# EAGLE board 200429 eAR ECU MPS20 PX Sensor PTH R00 (EAGLE 7.6.0)
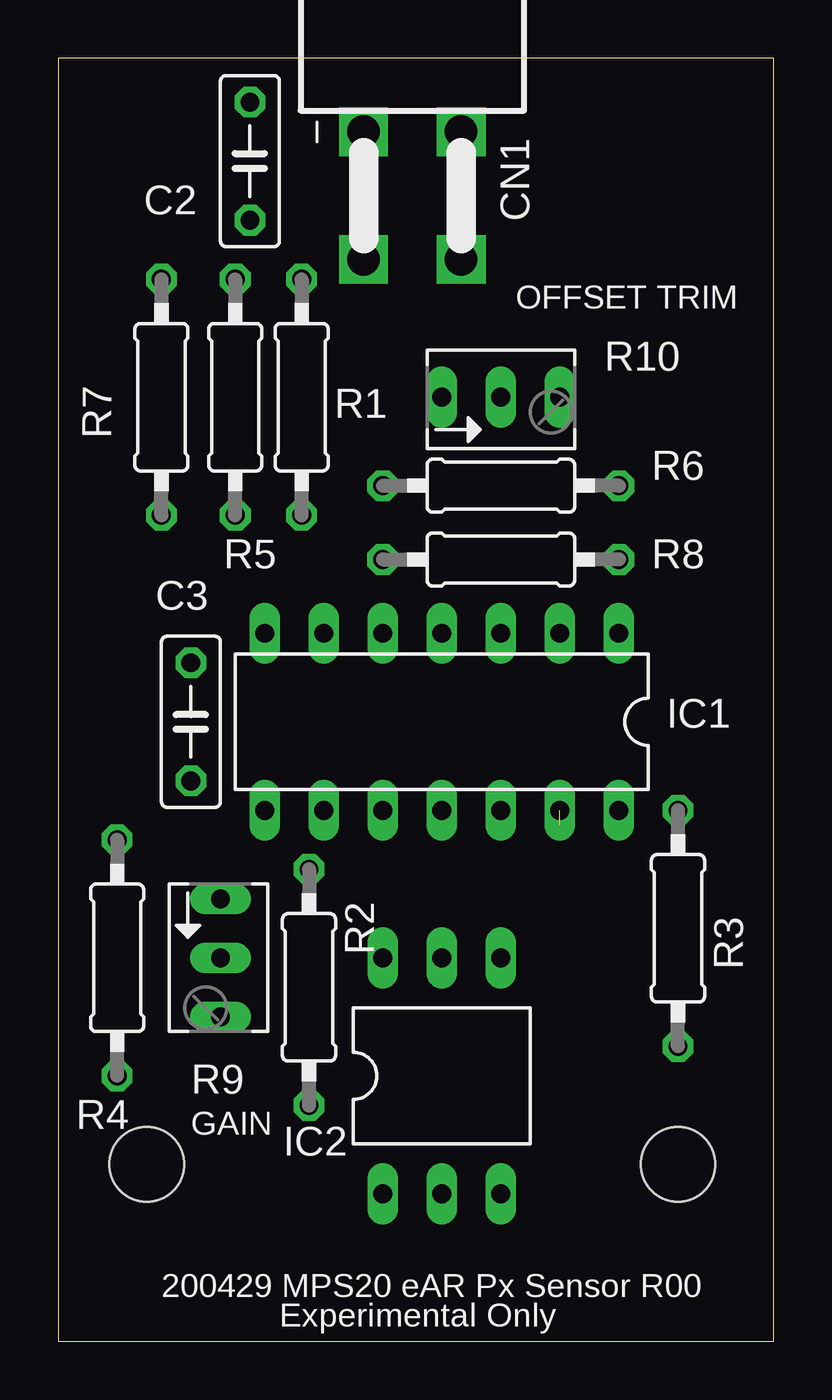
[diagram p0: board, top side]
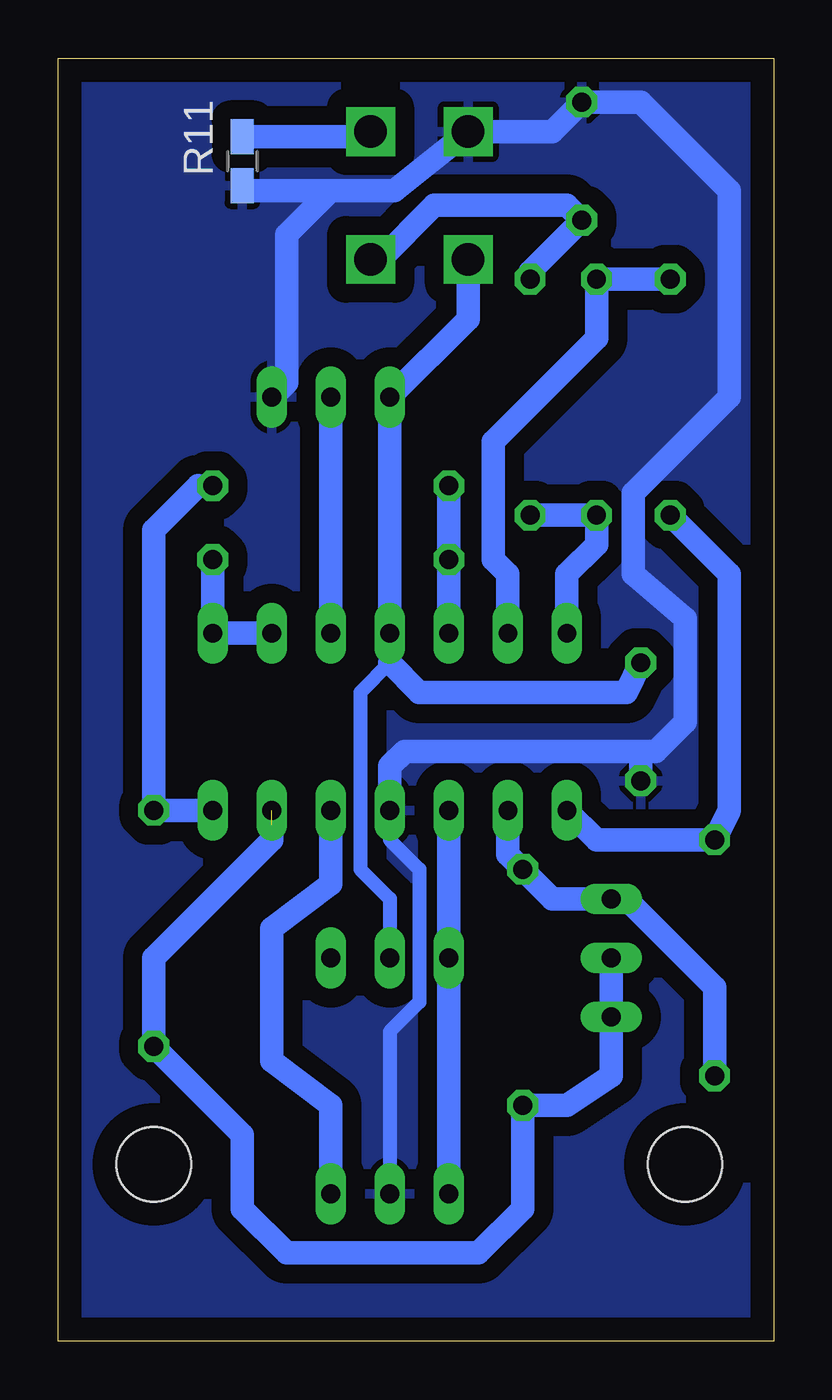
[diagram p1: board, bottom side, seen from below]

Size 30.79 x 55.23 mm. Coordinates in mm from the lower left corner, seen from the top.
Outline: 0,0 30.79,0 30.79,55.23 0,55.23 0,0
Copper layers (1*16): Top 0.035mm / dielectric 1.5mm / Bottom 0.035mm
Design rules "default": minimum track width 10mil, minimum drill 24mil, track to track 8mil, track to pad 8mil, pad to pad 8mil, via to via 8mil, smd to smd 8mil, copper to edge 40mil, drill to drill 8mil, minimum pad ring 10mil, minimum via ring 8mil, stop-mask expansion 4mil, vias tented up to drill 0mil, thermal gap 10mil
Holes 3.2 mm at 26.67,7.62 3.81,7.62

## Footprints (pad centres in the part's own frame; a part is rotated, then mirrored left to right if it is on the bottom)
C050-025X075 = drill 0.813 octagon: 1 -2.54,0; 2 2.54,0
MINIFIT4_90 = drill 1.4 square: 1 2.1,2.54; 2 -2.1,2.54; 3 2.1,8.04; 4 -2.1,8.04
DIL14 = drill 0.813 long: 1 -7.62,-3.81; 2 -5.08,-3.81; 3 -2.54,-3.81; 4 0,-3.81; 5 2.54,-3.81; 6 5.08,-3.81; 7 7.62,-3.81; 8 7.62,3.81; 9 5.08,3.81; 10 2.54,3.81; 11 0,3.81; 12 -2.54,3.81; 13 -5.08,3.81; 14 -7.62,3.81
DIL6-WIDE = drill 0.813 long: 1 -2.54,-6.35; 2 0,-6.35; 3 2.54,-6.35; 4 2.54,3.81; 5 0,3.81; 6 -2.54,3.81
0207/10 = drill 0.813 octagon: 1 -5.08,0; 2 5.08,0
B64Y = drill 0.813 long: A 2.54,0; E -2.54,0; S 0,0
R0805W = smd 1.5 x 1: 1 -1.052,0; 2 1.052,0

## Placement (x,y rotation side)
C2  .1  [C050-025X075]  8.26,50.8 90 top
C3  .1  [C050-025X075]  5.71,26.67 270 top
CN1  MINIFIT4_90  [MINIFIT4_90]  15.24,54.61 180 top
IC1  [DIL14]  16.51,26.67 180 top
IC2  MPS20N  [DIL6-WIDE]  16.51,12.7 0 top
R1  47K  [0207/10]  10.48,40.64 90 top
R2  1K  [0207/10]  10.79,15.24 90 top
R3  10K  [0207/10]  26.67,17.78 270 top
R4  10K  [0207/10]  2.54,16.51 270 top
R5  10K  [0207/10]  4.45,40.64 270 top
R6  10K  [0207/10]  19.05,36.83 0 top
R7  100K  [0207/10]  7.62,40.64 90 top
R8  100K  [0207/10]  19.05,33.66 0 top
R9  1K  [B64Y]  6.99,16.51 270 top
R10  10K  [B64Y]  19.05,40.64 0 top
R11  NTC  [R0805W]  22.86,50.8 90 bottom

## Library data of the parts
C2 C3 R1-R8 R11 = rcl
CN1 IC2 = FlexCustom
IC1 = linear
R9 R10 = pot

## Nets
+5V: C3.1 CN1.3 IC1.4 IC2.5 R10.E
GND: C2.2 C3.2 CN1.1 IC1.11 IC2.2 R10.A R11.1
N$1: IC1.10 IC2.1 IC2.6
N$2: C2.1 CN1.4 R1.2
N$3: IC1.12 IC2.3
N$4: IC1.9 R2.2 R4.2 R9.E
N$5: IC1.13 R2.1 R3.2 R9.A R9.S
N$6: IC1.7 R1.1 R7.1
N$7: IC1.8 R4.1 R5.2
N$8: IC1.14 R3.1 R6.2
N$9: IC1.3 R10.S
N$10: IC1.6 R5.1 R7.2
N$11: IC1.5 R6.1 R8.1
N$12: CN1.2 R11.2
N$13: IC1.1 IC1.2 R8.2

## Tracks (layer width: path | path; a pad name or v marks a point on that pad's centre or on a via)
+5V
  Bottom 0.61: 16.51,29.21 17.78,27.94 17.78,20.32 16.51,19.05 IC2.5
  Bottom 0.813: 16.51,29.21 IC1.4
  Bottom 1.016: C3.1 6.35,27.94 15.24,27.94 16.51,29.21 | IC1.4 R10.E 13.14,44.01 CN1.3
GND
  Bottom 0.61: IC1.11 16.51,21.59 15.24,20.32 15.24,14.61 16.51,13.34 IC2.2
  Bottom 1.016: 19.05,49.53 16.32,49.53 CN1.1 9.53,52.07 C2.2 5.71,53.34 1.91,49.53 1.91,40.64 6.03,36.51 6.03,33.02 3.81,31.11 3.81,26.67 5.08,25.4 5.71,25.4 | 19.05,49.53 20.95,47.62 20.95,41.27 R10.A | 5.71,25.4 15.88,25.4 16.51,24.77 IC1.11 | C3.2 5.71,25.4 | 19.05,49.53 22.64,49.53 R11.1
  pour Bottom (isolate 0.813): 0,55.24 30.48,55.24 30.48,0 0,0
N$1
  Bottom 1.016: IC1.10 IC2.6 IC2.1
N$2
  Bottom 1.016: CN1.4 16.93,46.57 14.61,48.9 8.89,48.9 C2.1 10.48,46.04 R1.2
N$3
  Bottom 1.016: IC1.12 19.05,19.68 21.59,17.78 21.59,12.06 19.05,10.16 IC2.3
N$4
  Bottom 1.016: R4.2 2.54,15.24 6.35,19.05 R9.E 9.53,19.05 R2.2 11.43,20.95 IC1.9
N$5  (1 unrouted)
  Bottom 1.016: R9.S R9.A 6.99,11.43 8.89,10.16 R2.1 10.79,5.71 12.7,3.81 20.95,3.81 22.86,5.71 22.86,8.89 R3.2 26.67,16.51 21.59,21.59 21.59,22.23
N$6
  Bottom 1.016: IC1.7 8.89,33.02 7.62,34.29 R7.1 R1.1
N$7
  Bottom 1.016: R5.2 1.91,33.02 1.91,22.86 R4.1 7.62,21.59 IC1.8
N$8
  Bottom 0.813: 24.77,36.83 R6.2
  Bottom 1.016: IC1.14 R3.1 26.67,34.92 24.77,36.83
N$9
  Bottom 1.016: IC1.3 R10.S
N$10
  Bottom 1.016: IC1.6 11.43,33.02 12.06,33.66 12.06,38.73 7.62,43.18 R7.2 R5.1
N$11
  Bottom 1.016: IC1.5 R8.1 R6.1
N$12
  Bottom 1.016: R11.2 17.56,51.85 CN1.2
N$13
  Bottom 1.016: R8.2 IC1.1 IC1.2

## Text on the board
tNames: OFFSET TRIM | GAIN | 200429 MPS20 eAR Px Sensor R00 | Experimental Only